# Altium PCB PCB2.PcbDoc
Units mil, origin at the board's own origin, x right, y up, seen from the top; angles counter-clockwise.
Board outline 6000 x 4000 mil, 2 copper layers (Top Layer, Bottom Layer); 11 components, 7 nets, 28 pads, 0 vias.
Unrouted connection lines stored in the file: 14.
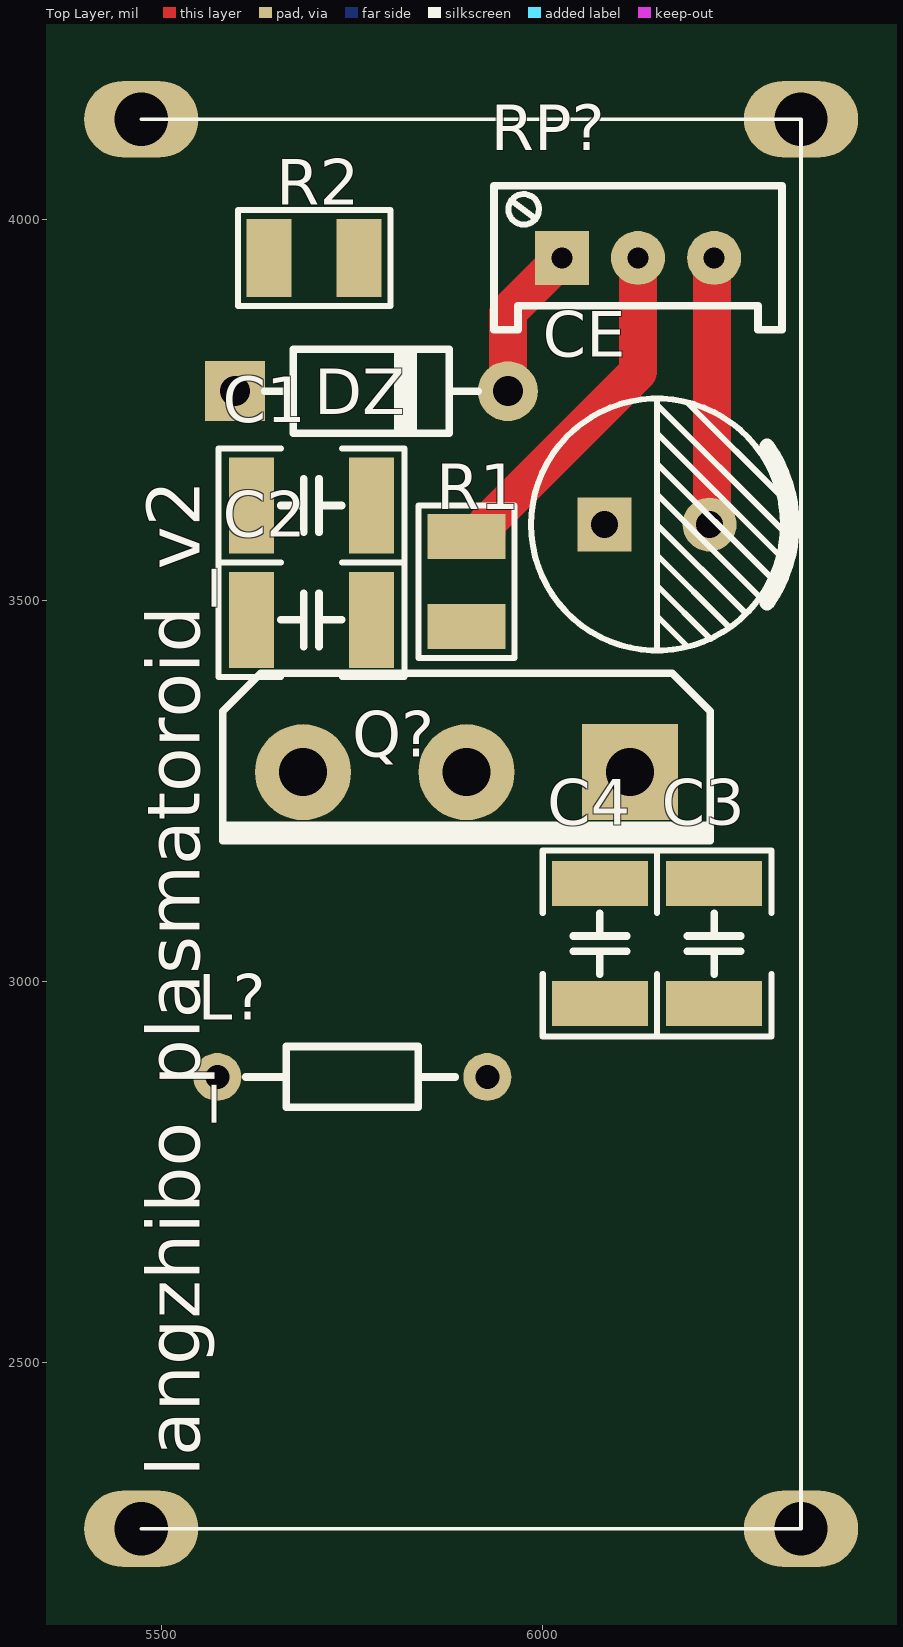
[diagram p0: Top Layer view]
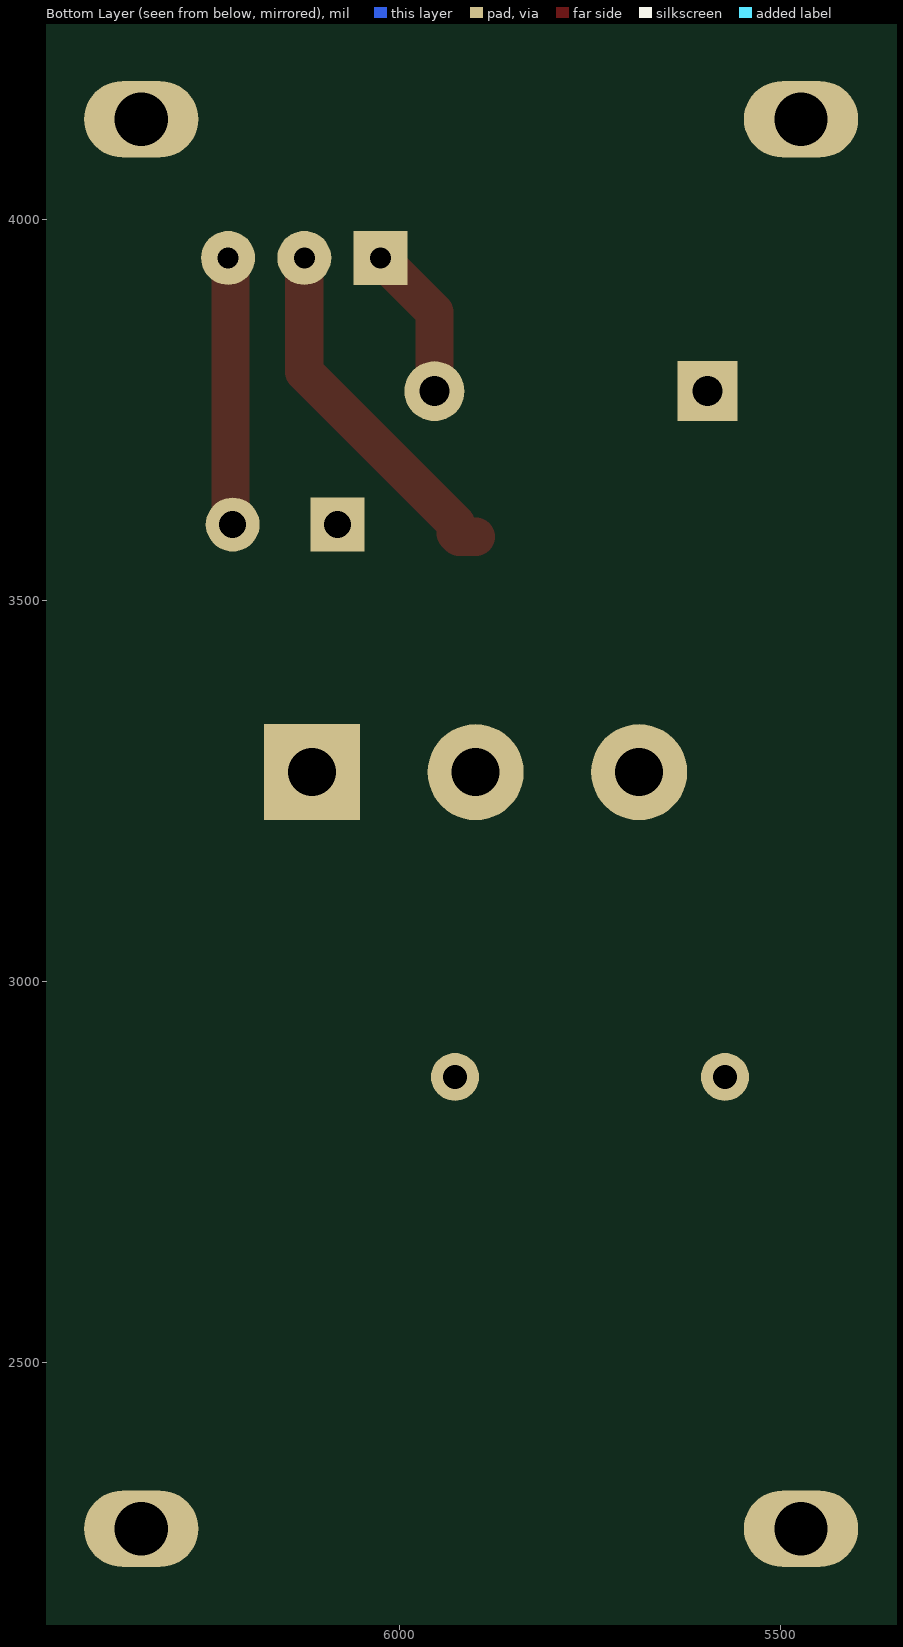
[diagram p1: Bottom Layer view, seen from below]

## Layer stack, top to bottom
Top Solder: solder mask 0.4, Solder Resist, Dk 3.5
Top Layer: signal copper 1.4
Dielectric 1: dielectric 12.6, FR-4, Dk 4.8
Bottom Layer: signal copper 1.4
Bottom Solder: solder mask 0.4, Solder Resist, Dk 3.5

## Board outline
1000,1000 7000,1000 7000,5000 1000,5000

## Design rules (kind name [scope] priority, off if disabled: settings)
Clearance [All] p1: gap=10 ignorepadtopadclearanceinfootprint=FALSE except(0: Arc-Hole Track-Hole SMDPad-Hole THPad-Hole Via-Hole Fill-Hole Poly-Hole Region-Hole Text-Hole)
PolygonConnect [All] p1: connectstyle=Relief reliefconductorwidth=10 reliefentries=4 polygonreliefangle="90 Angle" airgapwidth=10
RoutingVias [All] p1: holewidth=28 width=50 viastyle="Through Hole" minholewidth=28 minwidth=50 maxholewidth=28 maxwidth=50
SolderMaskExpansion [All] p1: expansion=4 istentingtop=FALSE
Width [All] p1: maxlimit=10 minlimit=10 preferedwidth=10
30 further rules are at their usual default settings.

## Components (designator, comment, footprint, x,y, rotation, side; value= is the part's Value field where it differs from the comment)
C1 "4.7n" C1812_L 5696.26,3625 r0 top
C2 "4.7n" C1812_L 5696.26,3475 r0 top
C3 "22p" C1812_L 6225,3050 r90 top
C4 "22p" C1812_L 6075,3050 r90 top
CE "30uF/50V" CE-3.5*8 6150,3600 r0 top
DZ "1N4743" DO-41 5775,3775 r0 top
L? "10uH" AL0204 5750,2875 r0 top
Q? "IRFP250" TO247A 5900,3275 r180 top
R1 "1K" R1210_M 5900,3525 r90 top
R2 "1K" R1210_M 5700,3950 r180 top
RP? "10K" 3296W 6125,3950 r0 top

## Footprints (in the part's own frame and the unit in brackets; to place one, negate y for a bottom-side part, rotate by r counter-clockwise, add the part's x,y. Pads: shape width x height; smd on the part's side, far side on the other; paste and mask are expansions set on the pad)
3296W [mm] "Precise Multi-Winding Adjustable Resistor             ÁªÏµÂô¼Ò Ãâ·Ñ²éÕÒ·â×°"
  rect 1.8x1.8 hole 0.7: 1(-2.54,0)
  round 1.8 hole 0.7: 2(0,0) 3(2.54,0)
  silkscreen extent -4.8,-2.4 4.8,2.4, body extent -4.75,-2.4 4.75,2.4, height 2.9
AL0204 [mm] "9*2*4mm£¨½Å¾à£¬Ö±¾¶£¬³¤¶È£©"
  round 1.6 hole 0.8: 1(-4.5,0) 2(4.5,0)
  silkscreen extent -3.56,-1.02 3.43,1.02, body extent -4.75,-1.02 4.75,1.02, height 2.07
C1812_L [mm] "ÌùÆ¬MLCCµçÈÝ                    ÁªÏµÂô¼Ò Ãâ·ÑÈË¹¤²éÕÒ·â×°"
  rect 1.5x3.2 smd: 1(-2,0) 2(2,0)
  silkscreen extent -3.1,-1.91 3.1,1.9, body extent -2.25,-1.6 2.25,1.6, height 2.6
CE-3.5*8 [mm] "½Å¾à3.5mmÖ±¾¶8mm¸ß¶È11.5mm        ÁªÏµÂô¼Ò Ãâ·ÑÈË¹¤²éÕÒ·â×°"
  rect 1.8x1.8 hole 0.9: 1(-1.75,0)
  round 1.8 hole 0.9: 2(1.75,0)
  silkscreen extent -4.2,-4.2 4.5,4.2, body extent -4,-4 4.01,4, height 11.64
DO-41 [mm] "2.6*9.1mm(Ö±¾¶£¬½Å¾à£©"
  rect 2x2 hole 1: 1(-4.55,0)
  round 2 hole 1: 2(4.55,0)
  silkscreen extent -3.56,-1.4 3.56,1.4, body extent -4.95,-1.3 4.95,1.3, height 2.6
R1210_M [mm] "1/3WÌùÆ¬µç×è            ÁªÏµÂô¼Ò Ãâ·Ñ²éÕÒ·â×°"
  rect 1.5x2.6 smd: 1(-1.5,0) 2(1.5,0)
  silkscreen extent -2.54,-1.6 2.54,1.6, body extent -1.6,-1.25 1.6,1.25, height 0.56
TO247A [mm] "247£¬3½ÅÁ¢Ê½·â×°                ÁªÏµÂô¼Ò Ãâ·Ñ²éÕÒ·â×°"
  rect 3.2x3.2 hole 1.6: 1(-5.45,0)
  round 3.2 hole 1.6: 2(0,0) 3(5.45,0)
  silkscreen extent -8.13,-3.3 8.13,2.29, body extent -7.75,-3 7.75,2, height 24

## Part data
C1 C2 C3 C4: library part C, "贴片电容/MLCC电容", BOM名称=无极性贴片电容, 当前库版本V2024.2.3 @淘宝卖家:黄晶宝石=最新版本发布https://item.taobao.com/item.htm?id=566775463719, 联系下单店铺卖家 免费帮你查找封装="联系下单店铺卖家 免费技术指导"
CE: library part CE, "直插电解电容", BOM名称=直插电解电容, 联系下单店铺卖家 免费帮你查找封装="联系下单店铺卖家 免费技术指导"
DZ: library part 1N4742, "12V/1W稳压管", BOM名称=12V/1W稳压管, 当前库版本V2024.2.3 @淘宝卖家:黄晶宝石=最新版本发布https://item.taobao.com/item.htm?id=566775463719
L?: library part L-AL, "色环电感", BOM名称=色环电感, 当前库版本V2024.2.3 @淘宝卖家:黄晶宝石=最新版本发布https://item.taobao.com/item.htm?id=566775463719
Q?: "N沟道 200V/30A", BOM名称=功率型N沟场效应管, 当前库版本V2024.2.3 @淘宝卖家:黄晶宝石=最新版本发布https://item.taobao.com/item.htm?id=566775463719, 联系下单店铺卖家 免费帮你查找封装="联系下单店铺卖家 免费技术支持"
R1 R2: library part R, "贴片电阻", BOM名称=贴片电阻, 联系下单店铺卖家 免费帮你查找封装="联系下单店铺卖家 免费技术指导"
RP?: library part RP, "单联电位器", BOM名称=插件电位器, 联系下单店铺卖家 免费帮你查找封装="联系下单店铺卖家 免费技术指导"

## Free pads (board coordinates)
  oval 150x100 hole 70: 47(6339,4132) 48(5473,4132) 49(5473,2282) 50(6339,2282)

## Nets (pads, with @x,y where several pads share a name; then routed paths per layer and width w, separated by ;. In a path a pad name is that pad's centre, name@x,y a point inside that pad or via, vN(x,y) a via of type N, cw(c..) or ccw(c..) an arc to the next point about the centre after c; other vN are vias at no path point)
NetC1_1: C1.1 C2.1 CE.2 DZ.1 Q?.3 RP?.3 | length 352.5
  Top Layer w50: CE.2 6221.95,3603.05 6221.95,3946.95 RP?.3
NetC1_2: C1.2 C2.2 C3.1 C4.1 Q?.1 R1.1
NetCE_1: CE.1 L?.2 R2.2
NetDZ_2: DZ.2 R2.1 RP?.1 | length 204.4
  Top Layer w50: DZ.2 5954.13,3879.13 RP?.1
NetR1_2: R1.2 RP?.2 | length 471.8
  Top Layer w50: R1.2 5921.65,3584.06 5926.18,3588.58 5926.18,3601.18 6125,3800 RP?.2
out1: C3.2 C4.2
out2: L?.1 Q?.2

## Silkscreen, mask and mechanical layers (free items; w line width, h text height)
Top Overlay:
  lines w5: 5473,2282 6339,2282 6339,4132 5473,4132
  text "langzhibo_plasmatoroid_v2" at 5550,2350 h70 r90